# Altium PCB CH32V205V-R0.PcbDoc (part 2 of 3)
Units mm, origin at the board's own origin, x right, y up, seen from the top; angles counter-clockwise.
Board outline 98 x 92 mm, 2 copper layers (Top Layer, Bottom Layer); 69 components, 110 nets, 401 pads, 975 vias.
Unrouted connection lines stored in the file: 82.
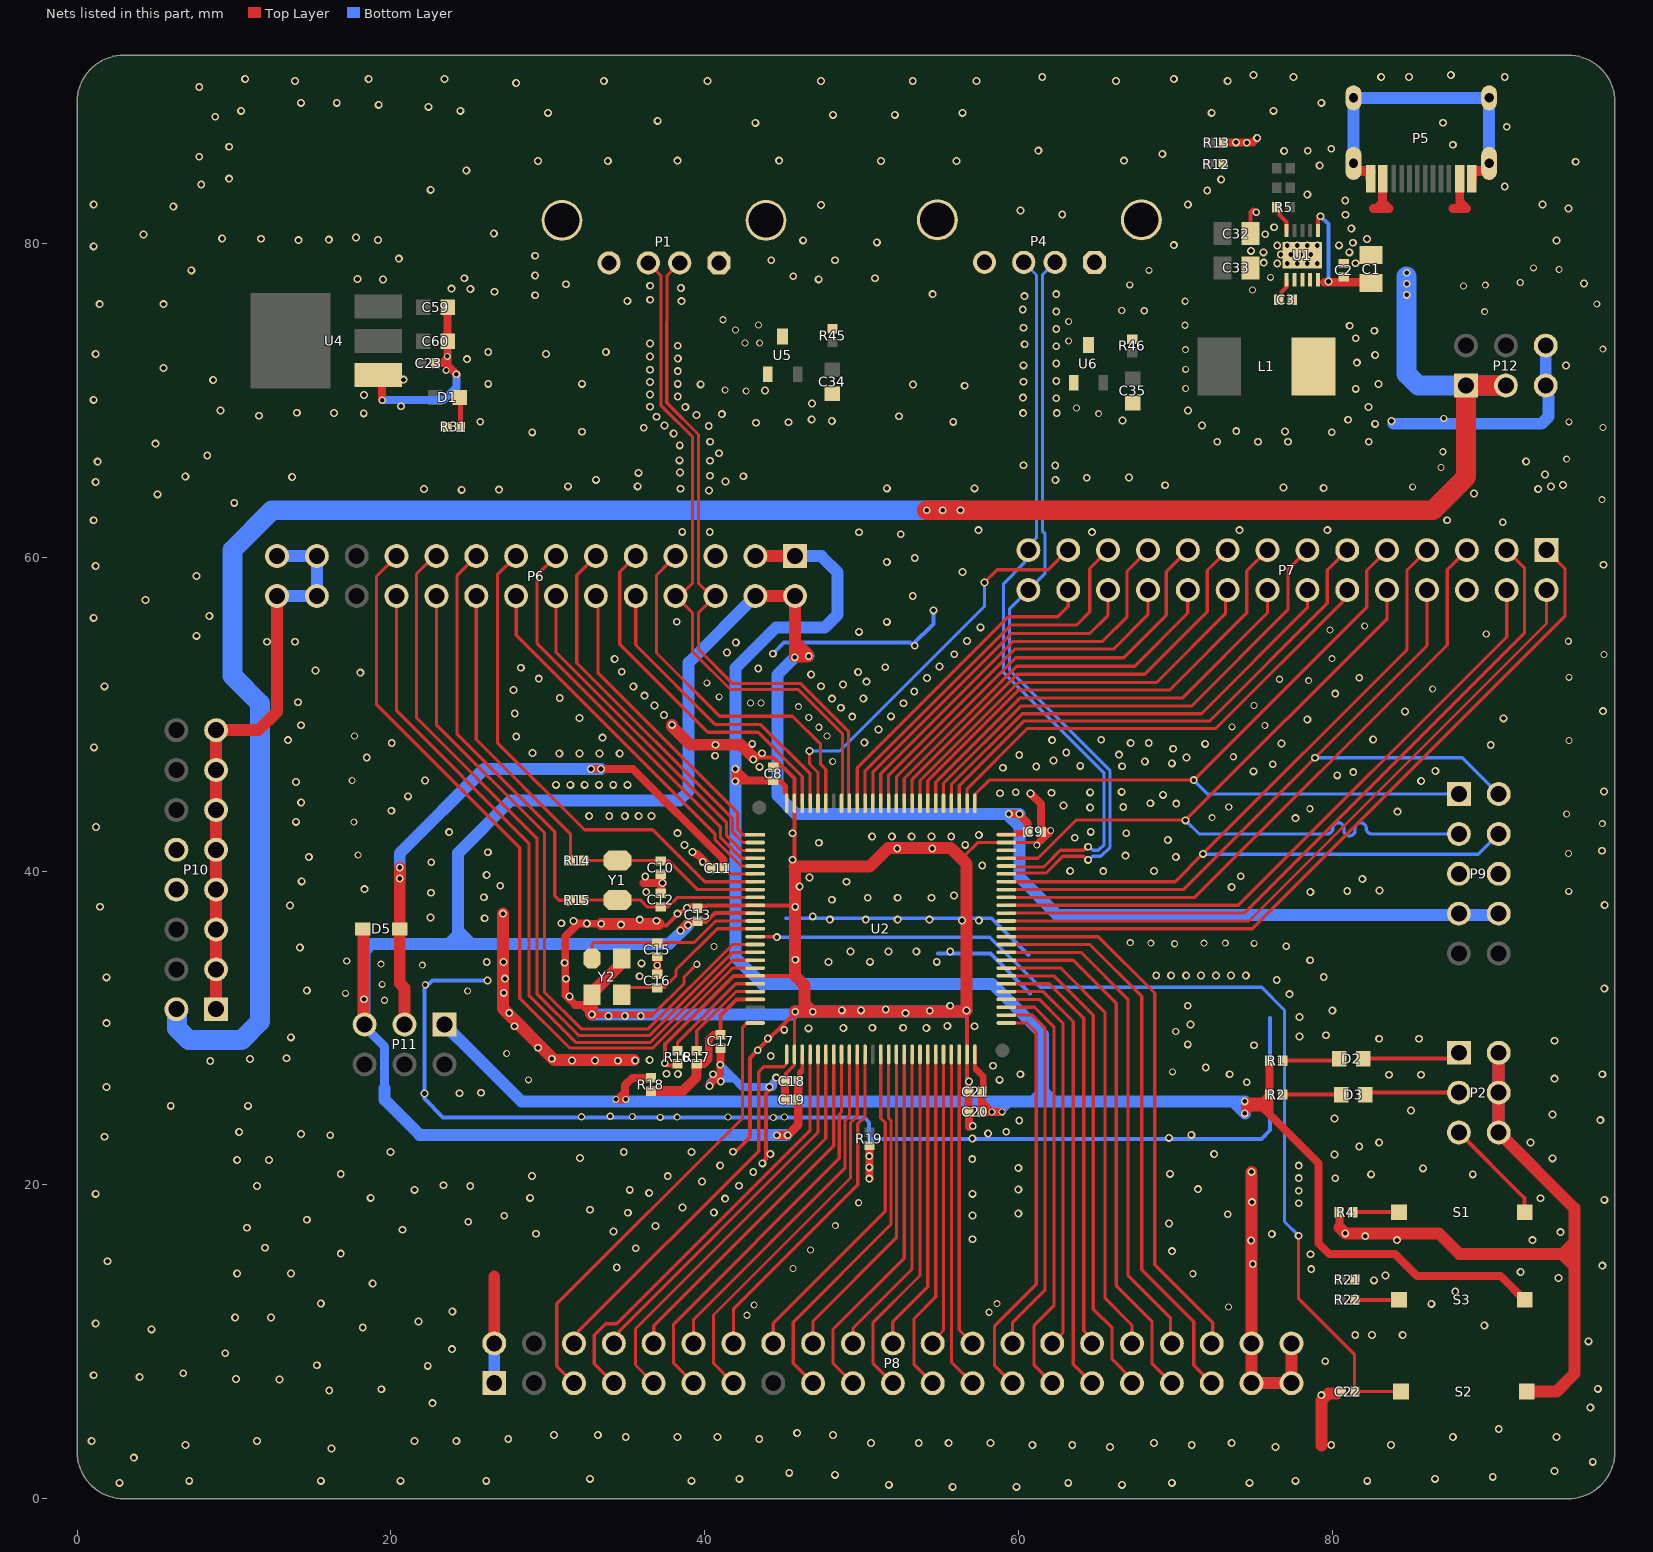
[diagram p2: the nets of this part, all layers, seen from the top]

## Via types
v1: diameter 0.5, hole 0.3, Top Layer to Bottom Layer, tented both sides, 745 vias
v2: diameter 0.45, hole 0.3, Top Layer to Bottom Layer, tented both sides, 120 vias
v3: diameter 0.508, hole 0.305, Top Layer to Bottom Layer, tented both sides, 110 vias

## Nets (pads, with @x,y where several pads share a name; then routed paths per layer and width w, separated by ;. In a path a pad name is that pad's centre, name@x,y a point inside that pad or via, vN(x,y) a via of type N, cw(c..) or ccw(c..) an arc to the next point about the centre after c; other vN are vias at no path point) (continued)
GND: C1.1 C2.1 C8.1 C9.2 C10.1 C11.1 C12.1 C13.2 C15.1 C16.1 C17.2 C18.1 C19.2 C20.2 C21.2 C22.1 C23.2 C32.1 C33.1 C34.2 C35.2 C59.2 C60.2 P1.0 P1.4 P2.2 P2.4 P2.6 P4.0 P4.4 P5.0 P5.A1 P5.B1 P6.5 P6.25 P6.26 P6.27 P6.28 P7.6 P8.1 P8.2 P8.39 P8.40 P8.41 P8.42 P9.5 P9.6 P10.1 P10.3 P10.5 P10.7 P10.8 P10.9 P10.10 P10.11 P10.13 P10.15 P12.5 P12.6 R4.1 R5.1 R12.2 R13.2 R16.1 R19.2 R21.2 R31.1 S2.1 U1.0 U1.5 U2.10 U2.19 U2.27 U2.49 U2.74 U2.99 U4.1 U5.1 U6.1 Y2.2 Y2.4 | length 487.4
  Top Layer w0.2: 36.691,30.843 38.676,32.828 38.676,33.24 v2(39.497,34.062)
  Top Layer w0.203: 45.187,27.111 45.715,27.639 U2.27@45.715,28.321 45.715,30.73 ; 56.506,40.64 56.583,40.718 56.583,40.997 57.402,41.816 59.21,41.816 U2.74@59.214,41.821 v2@61.115,41.821 ; 61.287,41.993 v2@61.115,41.821 ; C9.2@61.433,42.494 61.433,42.469 C9.2@61.581,42.321 ; 61.919,42.246 61.681,42.246 61.657,42.271 61.632,42.271 C9.2@61.608,42.295 ; v2@62.079,42.387 61.608,41.916 ; v2@61.115,41.821 v2@61.297,41.821 ; v2@61.297,41.821 61.297,42.271 61.348,42.321 C9.2@61.416,42.321 ; v2@61.297,41.821 61.513,41.821 61.608,41.916 ; v2@61.297,41.821 61.416,41.94 C9.2@61.416,42.321 ; C9.2@61.416,42.321 C9.2@61.581,42.321 ; C9.2@61.581,42.321 C9.2@61.608,42.295 ; 61.608,41.916 C9.2@61.608,42.295
  Top Layer w0.254: 36.211,36.525 37.557,36.525 v1@38.37,37.338 ; R16.1@38.268,27.711 38.167,27.61 37.63,27.61 37.481,27.759 37.481,28.981 41.821,33.321 U2.19@43.215,33.321 45.715,33.321 45.761,33.274 ; v1@38.308,37.342 38.441,37.342 38.558,37.459 38.633,37.459 38.995,37.821 39.626,37.821 39.669,37.777 40.09,37.777 40.097,37.77 40.136,37.808 43.202,37.808 U2.10@43.215,37.821 45.563,37.821 45.665,37.719 v1(45.761,37.719) ; v1@41.974,22.135 42.889,23.05 42.889,28.102 v1(43.373,28.585) 45.619,30.832 45.904,30.832 ; 43.348,47.244 44.363,47.244 45.715,45.892 U2.99@45.715,44.321 45.727,44.308 45.727,40.293 45.761,40.259 ; v1@43.671,21.382 43.671,21.423 43.897,21.649 43.897,25.837 v1@44.307,26.247 ; C18.1@45.187,26.584 45.187,27.111 ; v1(56.683,31.115) 56.714,31.084 U2.49@56.714,28.321 56.714,26.004 C21.2@56.813,25.905 ; v1@56.884,26.621 56.848,26.586 56.848,25.864 C21.2@56.892,25.82 ; C32.1@74.77,80.621 74.77,81.986 74.947,82.163 ; R5.1@76.324,82.163 R5.1@76.458,82.297 76.631,82.124 76.631,81.818 77.078,81.371 U1.5@77.078,80.824
  Top Layer w0.4: v1@32.568,30.843 36.568,30.843 ; C9.2@61.433,42.494 C9.2@61.495,42.556 ; C9.2@61.495,42.531 v2@62.001,42.531
  Top Layer w0.5: v1(32.807,30.861) 32.193,31.476 31.741,31.476 31.109,32.108 31.109,35.83 31.941,36.663 v1(32.489,36.663) 32.512,36.64 v1(33.405,36.64) ; v1(60.762,44.946) 61.433,44.275 C9.2@61.433,42.494 ; C9.2@61.416,42.419 61.433,42.436 C9.2@61.433,42.469
  Top Layer w0.508: U4.1@19.193,71.604 19.447,71.35 v1(19.447,70.004) ; C23.2@22.825,72.366 23.282,72.366 v2@23.613,72.696 ; C59.2@23.613,75.922 C60.2@23.613,73.763 v2@23.613,72.696 ; v1(24.171,71.655) 23.613,72.213 v2@23.613,72.696 ; 36.09,39.23 36.104,39.243 v1@37.202,39.243 ; C16.1@36.973,33.426 C15.1@36.973,34.558 ; C12.1@37.202,38.583 v1@37.202,39.243 ; C10.1@37.202,39.79 v1@37.202,39.243 ; v1(37.303,39.243) v1@37.202,39.243 ; 39.431,41.079 39.519,41.079 40.399,40.199 C11.1@40.399,40.174 ; v1@40.321,26.412 40.986,27.078 v1(40.986,27.661) ; v1@41.012,27.686 C17.2@41.012,28.716 ; v1@44.651,26.76 44.752,26.76 44.833,26.68 45.058,26.68 45.104,26.634 C19.2@45.104,25.425 ; v1(50.478,21.836) v1@50.494,21.852 ; R19.2@50.494,22.514 v1@50.494,21.852 ; v1@50.514,20.4 50.494,20.421 v1@50.494,21.17 ; v1@50.514,21.15 v1@50.494,21.17 ; C21.2@56.813,25.905 C20.2@56.813,24.653 56.826,24.641 56.826,23.7 ; R13.2@73.053,86.412 73.828,86.412 v1(73.854,86.437) v1@74.514,86.437 ; v1(74.54,86.412) v1@74.514,86.437 ; v1(75.2,86.717) 74.921,86.437 v1@74.514,86.437 ; 80.432,17.297 R4.1@80.432,18.263 ; v1@50.494,21.17 v1@50.494,21.852
  Top Layer w0.635: P5.0@81.339,85.096 81.339,84.78 81.508,84.611 82.417,84.611 P5.B1@82.434,84.594 ; P5.B1@82.384,84.126 P5.B1@82.384,84.594 ; P5.A1@88.884,84.126 88.884,84.594 88.902,84.611 89.811,84.611 89.98,84.78 P5.0@89.98,85.096
  Top Layer w0.762: P10.1@8.866,31.197 P10.3@8.866,33.737 P10.5@8.866,36.277 P10.7@8.866,38.817 P10.9@8.866,41.357 P10.11@8.866,43.897 P10.13@8.866,46.437 P10.15@8.866,48.977 11.554,48.977 12.741,50.165 P6.28@12.741,57.531 ; P8.2@26.584,9.906 26.584,14.174 ; v1(27.143,37.287) 27.143,31.242 30.428,27.957 v1@35.484,27.957 ; P1.0@30.551,81.107 P1.0@30.902,81.459 ; v1(32.807,30.861) 32.807,32.126 Y2.2@32.812,32.131 32.812,32.231 34.543,33.962 34.543,34.262 Y2.4@34.712,34.431 ; v1(33.405,36.64) v1@37.046,36.639 ; v1(37.908,49.316) 37.908,49.218 39.075,48.051 v1(40.679,48.051) 42.304,48.051 v1@43.094,47.26 ; 45.727,40.293 50.509,40.293 51.686,41.47 55.675,41.47 56.506,40.64 56.683,40.462 v1(56.683,31.115) 56.607,31.039 v1(46.879,31.039) ; v1(45.761,31.039) v1(46.879,31.039) ; 45.761,40.259 v1(45.761,37.719) 45.761,33.321 46.346,32.737 46.346,31.572 v1(46.879,31.039) ; P4.0@67.826,81.492 P4.0@68.113,81.205 ; v1(74.837,20.834) 74.844,20.827 P8.40@74.844,9.906 P8.39@74.844,7.366 ; P8.39@74.844,7.239 74.972,7.366 P8.41@77.384,7.366 P8.42@77.384,9.906 ; 79.289,3.404 79.289,6.259 79.736,6.706 C22.1@80.28,6.706 ; 80.432,17.297 v1(80.813,16.916) 86.782,16.916 88.103,15.596 94.656,15.596 ; P2.2@90.592,28.423 P2.4@90.592,25.883 P2.6@90.592,23.343 95.418,18.517 95.418,16.358 ; S2.1@92.369,6.833 94.276,6.833 95.418,7.976 95.418,14.834 ; 94.656,15.596 95.418,14.834 ; 94.656,15.596 95.418,15.596 ; 94.656,15.596 95.418,16.358 ; 95.418,14.834 95.418,15.596 ; 95.418,15.596 95.418,16.358
  Bottom Layer w0.254: v1(26.16,33.033) 26.156,33.037 22.654,33.037 22.128,32.511 22.128,25.506 23.332,24.301 50.173,24.301 50.48,23.995 50.48,22.942 ; v1(44.34,53.848) 45.047,54.556 53.086,54.556 53.217,54.424 v1@53.252,54.424 ; 45.177,36.994 58.279,36.994 60.624,34.649 ; v1@50.48,20.58 50.48,22.942 ; v1(53.381,54.356) 53.282,54.455 v1@53.252,54.424 ; v3@54.665,56.658 54.575,56.569 54.575,55.748 v1@53.252,54.424 ; 54.847,34.737 55.642,34.737 58.194,34.737 60.718,32.212 ; 76.018,30.623 76.018,23.485 75.474,22.942 69.588,22.942 57.054,22.942 50.48,22.942
  Bottom Layer w0.508: v1(19.447,70.004) 23.359,70.004 24.171,70.816 v1(24.171,71.655) ; v1@40.321,26.412 40.321,26.499 40.619,26.797 41.85,26.797 ; v1(40.986,27.661) 41.85,26.797 ; 45.279,26.67 45.189,26.76 44.651,26.76 44.354,26.463 44.354,26.294 44.307,26.247 42.4,26.247 41.85,26.797
  Bottom Layer w0.762: P10.1@8.485,31.578 P10.1@8.866,31.197 ; P6.28@12.741,57.531 P6.26@15.281,57.531 P6.25@15.281,60.071 P6.27@12.741,60.071 ; P8.1@26.584,7.366 P8.2@26.584,9.906 ; P1.0@30.915,81.446 P1.0@30.902,81.459 P1.0@30.919,81.476 ; v1(32.807,30.861) 45.584,30.861 v1(45.761,31.039) v1(46.879,31.039) 56.607,31.039 v1(56.683,31.115) ; P1.4@33.766,78.895 P1.4@33.903,78.759 ; P4.0@67.81,81.476 P4.0@67.826,81.492 ; P5.0@81.304,89.241 P5.0@81.339,89.276 ; P5.0@81.339,85.096 P5.0@81.339,89.276 ; v1@83.881,68.505 93.321,68.505 93.767,68.951 93.767,70.227 93.735,70.259 93.735,70.798 P12.5@93.59,70.943 P12.6@93.59,73.483 ; P5.0@89.98,85.096 P5.0@89.98,89.276 P5.0@81.339,89.276 ; P2.6@90.592,23.343 P2.4@90.592,25.883 P2.2@90.592,28.423
  other v1: 55.794,0.762 59.858,0.762 51.73,0.889 66.589,0.889 2.708,1.016 63.16,1.016 69.764,1.016 74.717,1.016 7.153,1.143 15.535,1.143 20.615,1.143 26.076,1.143 39.157,1.143 77.638,1.143 82.21,1.143 32.68,1.27 42.205,1.27 86.528,1.27 90.211,1.397 48.301,1.524 45.38,1.651 94.148,1.778 96.584,2.356 3.621,2.623 16.219,3.205 65.827,3.302 76.368,3.302 6.911,3.426 60.874,3.429 63.414,3.429 71.034,3.429 79.924,3.429 83.734,3.429 50.587,3.556 53.635,3.556 55.54,3.556 58.207,3.556 68.621,3.556 73.574,3.556 0.93,3.683 11.471,3.683 21.504,3.683 24.171,3.683 27.473,3.81 43.475,3.81 34.966,3.937 38.268,3.937 40.808,3.937 87.671,3.937 94.275,3.937 30.394,4.064 33.188,4.064 48.174,4.064 45.888,4.191 90.592,4.445 96.434,5.817 22.647,6.096 79.289,6.604 16.072,6.907 19.391,6.981 96.91,7.006 12.907,7.6 10.13,7.636 3.991,7.763 1.057,7.874 6.772,8.001 22.352,8.47 15.281,8.509 79.543,8.763 9.439,9.271 23.891,9.539 96.307,10.033 81.448,10.439 82.515,10.439 84.471,10.439 4.74,10.795 18.202,10.922 89.678,11.049 1.184,11.176 21.758,11.303 10.074,11.557 12.36,11.557 23.917,11.938 86.3,12.421 15.535,12.446 87.824,13.208 18.837,13.716 82.642,13.919 94.402,14.072 83.379,14.224 10.201,14.351 13.63,14.351 91.989,14.453 78.643,14.633 34.396,14.734 97.196,14.859 74.916,14.968 1.936,15.137 78.6,15.584 16.805,15.621 69.768,15.781 35.605,15.963 11.979,16.002 74.816,16.463 84.115,16.485 92.751,16.485 57.064,16.535 82.083,16.739 76.137,16.877 29.251,16.891 94.529,16.993 20.742,17.145 10.836,17.272 36.855,17.38 69.588,17.549 24.933,17.653 14.646,17.78 27.219,18.034 57.064,18.058 73.324,18.133 59.982,18.186 35.098,18.23 40.581,18.249 32.68,18.415 38.576,18.568 77.846,18.832 74.871,18.906 97.323,19.05 41.297,19.125 93.259,19.152 18.71,19.177 28.87,19.177 1.184,19.431 57.064,19.431 77.846,19.632 21.504,19.685 35.22,19.685 59.982,19.709 71.427,19.734 11.471,19.939 25.06,19.939 42.185,19.947 23.35,19.977 39.83,20.222 50.478,20.4 77.846,20.431 80.178,20.422 28.997,20.574 37.645,20.562 82.464,20.676 88.941,20.676 16.805,20.701 69.643,20.708 43.087,20.822 85.766,21.057 59.982,21.082 50.478,21.118 40.981,21.245 77.846,21.231 43.671,21.377 10.201,21.59 12.233,21.59 57.045,21.642 94.021,21.692 32.045,21.717 80.128,21.946 72.457,21.971 19.98,22.098 34.839,22.098 39.157,22.098 41.804,22.116 81.702,22.454 82.972,22.708 92.624,22.708 57.054,22.957 69.588,22.999 1.754,23.069 16.138,23.162 71.009,23.19 14.265,23.241 58.055,23.283 10.328,23.368 59.21,23.392 57.073,23.761 60.037,24.109 97.069,24.13 80.128,24.232 94.021,24.486 85.004,24.74 5.971,25.039 10.898,25.039 22.144,25.828 24.365,25.84 25.743,25.878 1.881,26.244 44.129,26.247 40.296,26.311 74.54,26.543 41.017,26.596 56.833,26.596 58.786,26.696 94.148,26.772 44.55,26.837 83.607,27.026 85.639,27.026 38.287,27.063 40.524,27.049 60.112,27.051 73.447,27.051 97.196,27.051 37.566,27.088 71.923,27.483 58.365,27.597 37.451,27.751 8.485,27.895 31.543,27.923 34.463,27.912 35.561,27.923 33.003,27.934 36.489,27.966 11.025,28.022 30.258,28.044 13.346,28.07 44.208,28.212 29.38,28.747 74.997,28.905 70.78,28.956 94.148,29.185 82.972,29.312 85.512,29.312 44.019,29.335 13.626,29.402 77.897,29.462 79.586,29.54 45.062,29.88 46.617,29.977 48.832,29.996 54.119,29.996 50.679,30.016 52.642,30.016 27.872,30.109 55.46,30.132 57.19,30.113 70.958,30.226 1.881,30.308 77.897,30.703 33.868,30.766 34.909,30.766 35.925,30.766 52.798,30.949 27.543,30.959 48.735,31.124 49.96,31.124 54.333,31.104 79.991,31.118 51.534,31.182 55.635,31.415 70.78,31.42 31.38,32.012 77.267,32.159 27.191,32.24 14.646,32.385 97.323,32.512 76.45,33.056 27.271,33.147 31.163,33.141 1.881,33.229 79.443,33.252 35.849,33.303 68.768,33.346 69.72,33.346 70.673,33.346 71.625,33.346 72.577,33.346 73.529,33.346 74.482,33.346 35.963,34.121 31.072,34.156 26.103,34.201 27.18,34.201 47.89,34.201 50.533,34.216 54.783,34.216 78.578,34.318 45.772,34.347 49.292,34.874 51.705,34.874 53.483,34.874 55.642,34.874 14.2,35.134 77.05,35.212 34.667,36.587 30.863,36.674 31.63,36.823 36.922,36.83 56.387,36.852 57.467,36.852 35.855,36.906 47.971,36.906 50.257,36.906 52.289,36.906 54.321,36.906 25.975,36.99 22.529,37.04 46.886,37.116 38.268,37.287 38.868,37.655 1.464,37.723 13.565,37.801 97.342,37.844 48.098,38.176 50.384,38.303 52.289,38.303 54.448,38.303 25.924,38.329 55.883,38.447 22.554,38.615 36.268,38.673 78.59,38.672 80.94,38.735 82.998,38.76 18.318,38.849 73.574,38.989 46.046,39.011 26.965,39.065 49.033,39.323 14.313,39.346 81.906,39.497 46.67,39.587 36.211,39.649 74.159,39.675 26.102,39.751 68.621,40.005 57.683,40.355 22.573,40.561 39.869,40.589 45.59,40.726 14.773,40.894 70.018,40.894 66.806,40.985 26.178,41.199 39.213,41.21 97.176,41.293 52.264,41.445 54.495,41.445 38.709,41.662 56.602,41.67 47.27,41.806 69.51,41.986 63.579,42.127 50.665,42.203 51.924,42.203 53.184,42.203 54.443,42.203 55.703,42.203 57.467,42.298 38.259,42.417 45.59,42.406 66.856,42.409 23.713,42.482 64.593,42.498 1.21,42.803 13.946,43.135 77.637,43.375 32.632,43.509 33.916,43.509 34.91,43.509 35.787,43.509 36.603,43.509 84.141,43.79 20.031,43.84 66.671,44.081 70.044,44.298 68.393,44.323 14.278,44.373 21.09,44.762 69.206,44.856 58.817,44.958 62.089,44.996 59.82,45.021 64.559,45.016 66.566,45.047 97.303,45.073 30.526,45.493 31.436,45.493 32.347,45.493 33.257,45.493 34.167,45.493 35.078,45.493 13.946,45.675 85.651,45.733 22.168,45.773 80.305,46.101 81.321,46.304 74.971,46.355 86.554,46.38 58.997,46.583 43.491,46.643 61.124,46.661 66.598,46.683 63.929,46.704 76.191,46.812 69.764,46.863 43.088,47.113 18.456,47.244 40.659,47.349 60.035,47.401 66.401,47.419 30.733,47.488 34.575,47.488 43.648,47.51 29.02,47.521 63.038,47.552 69.846,47.792 1.083,47.883 90.084,48.031 43.027,48.107 71.885,48.107 76.749,48.133 20.057,48.158 67.137,48.156 50.171,48.19 13.438,48.342 62.136,48.345 65.27,48.366 82.591,48.387 27.991,48.57 51.068,49.019 14.268,49.29 78.4,49.657 90.897,49.733 32.016,49.753 49.4,49.84 51.868,49.858 37.397,49.948 27.889,50.046 84.623,50.165 97.233,50.19 48.675,50.405 36.797,50.556 52.668,50.697 14.076,50.759 48.11,50.987 50.105,51.003 30.762,51.031 36.164,51.181 80.178,51.308 53.353,51.44 27.806,51.541 1.754,51.771 35.449,51.765 47.412,51.782 48.809,51.892 50.308,52.07 29.416,52.263 54.163,52.298 81.702,52.324 46.78,52.522 18.053,52.646 49.775,52.68 34.712,52.705 15.201,52.78 43.404,52.912 28.283,52.961 51.497,52.992 54.964,53.031 34.255,53.518 55.893,53.822 41.42,53.93 41.98,54.563 12.106,54.61 13.884,54.61 56.704,54.666 57.568,55.53 38.212,55.892 51.603,55.88 1.057,56.134 53.254,57.531 1.184,59.436 97.273,59.523 51.603,59.69 53.381,59.944 52.492,61.468 40.32,61.606 49.825,61.595 38.563,61.616 90.846,62.23 1.057,62.357 40.268,64.247 38.459,64.361 1.184,64.787 62.342,64.921 40.33,65.193 38.427,65.401 62.337,65.845 60.304,65.86 1.311,66.092 40.33,66.15 38.396,66.171 38.407,67.127 40.341,67.356 72.658,67.357 75.252,67.357 77.167,67.357 82.307,67.357 38.017,67.883 29.006,67.958 79.955,67.963 32.172,67.997 76.973,68.011 73.87,68.035 36.109,68.251 40.254,68.355 71.688,68.399 82.719,68.496 43.27,68.569 45.335,68.598 25.695,68.632 55.832,68.627 48.097,68.685 83.76,68.683 66.617,68.714 46.809,68.77 80.997,68.763 36.926,68.946 52.377,68.98 11.598,69.013 18.274,69.169 16.368,69.194 60.289,69.182 62.434,69.182 14.007,69.206 70.787,69.347 38.762,69.574 82.293,69.569 36.509,69.584 20.641,69.623 46.835,69.8 1.057,70.029 62.394,70.131 60.285,70.17 38.279,70.237 18.285,70.335 43.841,70.621 81.482,70.726 56.559,70.925 53.274,71.012 26.203,71.045 32.172,71.045 38.279,71.047 82.937,71.041 36.509,71.161 60.305,71.179 62.394,71.235 20.797,71.318 38.279,71.857 36.509,71.95 94.879,72.218 60.305,72.227 62.394,72.339 81.555,72.399 82.719,72.884 1.184,72.95 29.886,72.95 26.203,73.077 33.696,73.077 62.394,73.443 38.279,73.478 60.384,73.572 36.509,73.613 81.482,73.951 82.67,74.435 62.394,74.548 60.305,74.62 81.094,74.751 62.394,75.652 60.266,75.787 1.438,76.125 35.067,76.321 38.513,76.319 36.52,76.402 29.191,76.696 26.601,76.919 23.864,77.113 38.478,77.156 36.52,77.294 31.156,77.395 24.679,77.776 50.841,77.776 45.634,77.903 29.191,77.955 76.477,78.717 77.116,78.717 77.754,78.717 78.393,78.717 79.031,78.717 81.468,78.732 75.625,78.77 44.237,78.919 48.301,78.919 29.191,79.214 76.704,79.293 77.343,79.293 77.982,79.293 78.62,79.293 75.604,79.425 74.812,79.52 1.057,79.808 76.48,79.869 77.119,79.869 77.757,79.869 78.396,79.869 79.035,79.869 81.298,80.035 50.968,80.062 46.269,80.189 4.232,80.57 75.718,80.582 81.201,80.948 76.284,81.026 80.826,81.823 75.139,81.979 95.037,82.221 6.137,82.348 47.412,82.45 1.057,82.475 93.386,82.475 80.813,82.729 78.4,83.11 72.02,83.368 22.532,83.409 90.973,83.618 7.915,83.745 72.906,84.071 9.693,84.126 79.183,84.958 95.494,85.203 7.788,85.523 76.917,85.887 78.423,85.901 79.924,86.031 9.693,86.158 87.671,86.285 91.1,87.428 87.036,87.682 8.804,88.063 10.455,88.444 24.425,88.444 22.393,88.698 19.218,88.825 14.265,88.952 16.551,88.952 79.289,88.952 7.788,89.968 27.981,90.222 13.884,90.349 33.569,90.349 40.173,90.349 47.412,90.349 53.254,90.349 57.318,90.349 66.208,90.349 73.32,90.349 10.709,90.476 18.583,90.476 23.409,90.476 69.891,90.476 61.509,90.603 77.511,90.603 83.099,90.603 84.877,90.603 90.973,90.603 74.971,90.73 87.544,90.73
  other v2: 42.692,11.696 58.124,11.888 73.373,12.22 43.149,12.351 58.626,12.437 71.105,14.34 45.618,14.676 46.737,15.861 48.317,17.408 49.809,18.867 37.162,24.307 38.243,24.316 44.37,24.303 32.139,24.345 41.483,24.327 45.081,24.333 35.386,24.366 33.976,24.376 28.767,26.695 69.811,27.209 27.374,28.371 70.013,29.783 19.593,31.768 17.105,32.206 24.891,32.364 22.191,32.755 19.444,32.783 36.973,33.992 22.005,34.003 19.37,34.068 17.185,34.266 40.585,35.195 69.941,35.371 68.426,35.404 71.813,35.404 73.173,35.404 75.007,35.399 67.111,35.438 95.057,38.709 17.914,41.029 95.035,41.119 61.159,41.651 62.039,42.587 97.197,43.02 17.635,43.134 72.336,43.401 94.923,43.635 78.559,43.973 73.388,44.09 17.528,45.776 48.151,46.979 73.683,47.286 95.075,48.319 17.678,48.611 47.794,48.607 47.267,49.167 73.593,49.194 75.69,49.28 46.627,49.79 45.98,50.477 75.005,50.545 42.919,50.709 43.59,50.709 40.921,51.103 86.383,51.607 40.133,51.997 78.482,52.134 76.619,52.222 95.075,52.343 79.972,53.539 97.297,53.801 95.03,54.645 89.796,55.103 79.838,55.366 82.053,55.62 97.178,63.666 85.107,64.482 86.916,65.717 94.921,66.251 87.031,66.722 97.238,68.264 95.066,68.629 87.088,68.847 65.101,69.145 63.683,69.507 42.64,70.587 41.303,70.657 70.647,70.751 23.52,71.908 70.647,71.971 23.598,72.8 70.629,73.223 97.225,73.26 42.562,73.653 43.502,73.653 63.191,73.775 41.962,74.485 70.606,74.783 43.425,74.793 63.191,75.02 41.161,75.132 89.699,75.644 66.573,75.723 68.006,75.705 96.844,76.134 70.613,76.312 74.899,77.03 88.343,77.276 67.081,77.356 89.741,77.34 91.967,77.509 76.047,77.837 68.314,78.281 94.446,78.336 92.814,78.442
  other v3: 34.18,17.025 36.459,19.491 44.176,21.963 63.287,40.005 65.393,39.995 64.557,44.044 62.856,44.171 68.04,46.98 62.223,47.046 70.692,47.229 32.018,47.484 33.298,47.484 68.291,48.158 33.475,48.499 7.618,54.991 49.825,55.245 8.429,56.261 54.575,56.617 4.359,57.277 7.618,58.801 56.429,59.055 64.684,61.595 57.445,61.722 74.082,61.722 79.67,61.722 87.31,62.356 10.018,63.466 5.121,64.008 89.015,64.061 24.509,64.293 26.887,64.303 22.101,64.339 93.107,64.348 51.603,64.389 57.191,64.389 79.441,64.411 76.884,64.435 31.283,64.516 35.728,64.516 93.92,64.508 69.341,64.586 94.682,64.593 41.312,64.827 33.061,64.932 64.341,65.065 13.707,65.106 67.03,65.089 6.899,65.151 42.455,65.159 93.539,65.279 35.779,65.381 92.345,66.092 8.296,66.473 40.91,66.625 4.994,67.235 37.435,68.392 39.481,69.056 41.084,69.115 9.135,69.343 36.505,70.377 39.739,71.015 8.677,71.299 5.502,72.061 24.857,72.62 38.283,72.672 36.505,72.786 5.502,76.125 60.366,76.633 54.524,76.76 62.398,76.76 25.06,77.09 96.036,77.443 19.498,77.7 47.261,77.707 17.872,77.725 7.28,78.284 20.502,79.021 81.073,79.427 69.891,79.884 80.414,79.874 94.275,80.189 14.11,80.204 19.183,80.217 16.041,80.231 82.204,80.276 11.721,80.293 9.252,80.316 17.769,80.367 26.559,80.621 62.779,81.84 60.112,82.094 70.78,82.475 24.806,84.634 29.378,85.244 33.823,85.244 51.222,85.244 56.048,85.244 38.268,85.269 44.745,85.269 66.716,85.269 69.155,85.701 61.255,85.904 43.221,87.682 36.998,87.809 48.174,88.19 52.111,88.19 30.013,88.317 56.429,88.317 72.304,88.317 76.241,88.444
KEY: P2.5 S1.1 | length 6.8
  Top Layer w0.254: P2.5@88.052,23.343 92.242,19.153 S1.1@92.242,18.263
LED1: D2.2 P2.1 | length 6.2
  Top Layer w0.254: D2.2@81.973,28.042 87.671,28.042 P2.1@88.052,28.423
LED2: D3.2 P2.3 | length 6
  Top Layer w0.254: D3.2@82.1,25.756 82.227,25.883 P2.3@88.052,25.883
NC: U2.73
NetC3_1: C3.1 U1.6 | length 1.5
  Top Layer w0.254: C3.1@76.585,76.404 76.758,76.577 76.758,76.886 77.078,77.206 U1.6@77.078,77.674
NetC3_2: C3.2 L1.1 U1.7 U1.8
NetD1_2: D1.2 R31.2 | length 1.9
  Top Layer w0.305: D1.2@24.375,70.181 24.437,70.119 R31.2@24.437,68.302
NetD2_1: D2.1 R1.2 | length 3.6
  Top Layer w0.254: R1.2@76.837,27.915 80.305,27.915 D2.1@80.432,28.042
NetD3_1: D3.1 R2.2 | length 3.7
  Top Layer w0.254: R2.2@76.821,25.756 D3.1@80.559,25.756
NetR4_2: R4.2 S1.2 | length 3
  Top Layer w0.254: R4.2@81.282,18.263 S1.2@84.242,18.263
NetR22_2: R22.2 S3.2 | length 2.8
  Top Layer w0.254: R22.2@81.409,12.675 S3.2@84.242,12.675
NRST: C22.2 S2.2 U2.14 | length 64.8
  Top Layer w0.203: U2.14@43.215,35.821 43.219,35.816 44.566,35.816 v1(44.593,35.789) ; v1(77.842,16.764) 77.842,12.751 81.409,9.183 C22.2@81.409,6.833 S2.2@84.369,6.833
  Bottom Layer w0.203: v1(44.593,35.789) 58.17,35.789 61.366,32.593 75.494,32.593 76.944,31.144 76.944,17.662 v1(77.842,16.764)
PA2: P8.5 U2.25 | length 28.9
  Top Layer w0.203: P8.5@31.664,7.366 30.572,8.458 30.572,12.43 42.409,24.267 42.409,30.036 42.686,30.313 43.206,30.313 U2.25@43.215,30.321
PA3: P8.6 U2.26 | length 24.8
  Top Layer w0.203: P8.6@31.664,9.906 31.917,10.159 31.917,10.632 43.437,22.152 43.437,27.205 43.76,27.528 45.026,27.528 45.21,27.711 45.21,28.316 U2.26@45.215,28.321
PA4: P8.7 U2.29 | length 27.6
  Top Layer w0.203: P8.7@34.204,7.366 32.957,8.614 32.957,10.426 33.689,11.158 34.393,11.158 46.715,23.48 U2.29@46.715,28.321
PA5: P8.8 U2.30 | length 23.8
  Top Layer w0.203: P8.8@34.204,9.906 34.337,10.039 34.337,10.396 34.54,10.599 34.54,10.673 47.215,23.348 U2.30@47.215,28.321
PA6: P8.9 U2.31 | length 26.5
  Top Layer w0.203: P8.9@36.744,7.366 35.584,8.527 35.584,10.828 47.715,22.959 U2.31@47.715,28.321
PA7: P8.10 U2.32 | length 23.2
  Top Layer w0.203: P8.10@36.744,9.906 36.744,11.027 48.215,22.498 U2.32@48.215,28.321
PA8: P7.5 U2.67 | length 41.3
  Top Layer w0.203: U2.67@59.214,38.321 71.23,38.321 87.316,54.407 87.316,59.207 P7.5@88.56,60.452
PA9: P7.8 P9.2 U2.68 | length 49.5
  Top Layer w0.203: U2.68@59.214,38.821 70.485,38.821 86.02,54.356 86.02,57.785 P7.8@85.893,57.912
  Bottom Layer w0.203: v1(78.883,47.219) 88.281,47.219 P9.2@90.592,44.907
PA10: P7.7 P9.4 U2.69 | length 57.9
  Top Layer w0.203: U2.69@59.214,39.321 69.969,39.321 v1(71.746,41.097) 84.75,54.102 84.75,59.182 P7.7@86.02,60.452
  Bottom Layer w0.203: v1(71.746,41.097) 71.771,41.072 89.297,41.072 P9.4@90.592,42.367
PA11: P4.2 P7.28 U2.70 | length 48.7
  Top Layer w0.203: U2.70@59.214,39.821 59.742,39.821 59.802,39.88 61.756,39.88 62.82,40.945 64.143,40.945 v1@64.321,40.767
  Bottom Layer w0.203: P4.2@62.271,78.792 P4.2@62.326,78.792 61.517,77.983 61.517,61.664 61.687,61.493 61.687,58.979 P7.28@60.62,57.912 59.427,56.718 59.427,52.787 65.827,46.386 65.827,41.529 65.243,40.945 64.718,40.945 64.54,40.767 v1@64.43,40.767
  other v1: 64.43,40.716
PA12: P4.3 P7.27 U2.71 | length 48.4
  Top Layer w0.203: U2.71@59.214,40.321 59.742,40.321 59.802,40.261 61.598,40.261 62.662,41.326 64.143,41.326 64.321,41.504 64.43,41.504 v1@64.54,41.504
  Top Layer w0.3: v1@64.371,41.444 v1@64.43,41.504
  Bottom Layer w0.203: P4.3@60.45,78.792 P4.3@60.326,78.792 61.136,77.983 61.136,61.231 60.911,61.007 60.911,60.452 P7.27@60.62,60.452 60.368,60.199 60.368,59.64 59.046,58.318 59.046,52.629 65.446,46.228 65.446,41.687 65.085,41.326 64.718,41.326 64.54,41.504 v1@64.43,41.504
  other v1: 64.43,41.554
PA13: P7.10 P9.3 U2.72 | length 52.1
  Top Layer w0.203: U2.72@59.214,40.821 61.233,40.821 63.668,43.256 70.603,43.256 v1(70.628,43.231) 83.48,56.083 P7.10@83.48,57.912
  Bottom Layer w0.203: v1(70.628,43.231) 71.492,42.367 79.562,42.367 79.663,42.367 ccw(c79.663,42.723) 80.019,42.723 cw(c80.375,42.723) 80.73,42.723 80.73,42.594 ccw(c81.086,42.594) 81.441,42.594 81.441,42.723 cw(c81.797,42.723) 82.153,42.723 ccw(c82.508,42.723) 82.508,42.367 86.68,42.367 P9.3@88.052,42.367
PA14: P7.9 P9.1 U2.76 | length 51.9
  Top Layer w0.203: U2.76@57.214,44.321 57.219,44.326 57.219,44.884 58.131,45.796 v1(71.161,45.796) 82.185,56.82 82.185,59.157 P7.9@83.48,60.452
  Bottom Layer w0.203: v1(71.161,45.796) 72.05,44.907 P9.1@88.052,44.907
PA15: P7.12 U2.77 | length 30.7
  Top Layer w0.203: U2.77@56.714,44.321 56.714,45.256 60.543,49.085 72.57,49.085 80.688,57.202 80.688,57.659 P7.12@80.94,57.912
PB0: P8.13 U2.35 | length 25.3
  Top Layer w0.203: P8.13@41.824,7.366 40.554,8.636 40.554,11.711 49.284,20.44 49.284,23.95 49.715,24.381 U2.35@49.715,28.321
PB1: P8.14 U2.36 | length 21.9
  Top Layer w0.203: P8.14@41.824,9.906 41.824,12.088 49.749,20.013 49.749,23.889 50.214,24.354 U2.36@50.214,28.321
PB3: P7.24 U2.89 | length 22.7
  Top Layer w0.203: U2.89@50.714,44.321 50.714,46.304 59.543,55.132 64.518,55.132 65.7,56.314 P7.24@65.7,57.912
PB4: P7.23 U2.90 | length 25
  Top Layer w0.203: U2.90@50.214,44.321 50.214,46.388 59.503,55.677 63.686,55.677 64.532,56.523 64.532,59.284 P7.23@65.7,60.452
PB5: P7.26 U2.91 | length 21
  Top Layer w0.203: U2.91@49.715,44.321 49.715,46.576 59.349,56.21 62.5,56.21 63.16,56.871 P7.26@63.16,57.912
PB6: P1.3 P6.8 U2.93 | length 43.2
  Top Layer w0.203: P1.3@36.403,78.759 37.213,77.948 37.213,75.151 37.202,75.14 37.202,69.684 39.221,67.664 39.221,58.344 38.408,57.531 P6.8@38.141,57.531 39.221,56.452 39.221,53.984 41.637,51.568 45.953,51.568 48.774,48.747 48.774,44.908 48.715,44.849 U2.93@48.715,44.321
PB7: P1.2 P6.6 U2.92 | length 43.2
  Top Layer w0.203: P1.2@38.403,78.759 38.403,78.754 37.594,77.946 37.594,74.994 37.583,74.982 37.583,69.841 39.602,67.822 39.602,58.344 40.415,57.531 P6.6@40.681,57.531 39.602,56.452 39.602,54.142 41.795,51.949 46.111,51.949 49.155,48.905 49.155,44.908 49.215,44.849 U2.92@49.215,44.321
PB8: P6.7 U2.95 | length 23.1
  Top Layer w0.203: P6.7@37.71,59.918 37.71,59.64 36.922,58.852 36.922,53.899 40.96,49.861 45.591,49.861 47.379,48.072 47.379,46.807 47.715,46.472 U2.95@47.715,44.321
PB9: P7.25 U2.96 | length 26.2
  Top Layer w0.203: v1(46.673,47.657) 46.673,46.824 47.215,46.283 U2.96@47.215,44.321 ; v1(57.826,58.395) 58.639,59.207 61.891,59.207 P7.25@63.11,60.427
  Bottom Layer w0.203: v1(46.673,47.657) 48.619,47.657 57.826,56.864 v1(57.826,58.395)
PB10: P8.25 U2.47 | length 21.5
  Top Layer w0.203: U2.47@55.714,28.321 55.714,8.716 P8.25@57.064,7.366
PB11: P8.26 U2.48 | length 18.8
  Top Layer w0.203: U2.48@56.214,28.321 56.214,10.756 P8.26@57.064,9.906
PB12: P8.27 U2.51 | length 26.1
  Top Layer w0.203: U2.51@59.214,30.321 59.219,30.316 60.535,30.316 61.128,29.723 61.128,13.66 58.455,10.986 58.455,8.516 P8.27@59.604,7.366
PB13: P8.28 U2.52 | length 23.8
  Top Layer w0.203: U2.52@59.214,30.821 60.864,30.821 61.687,29.997 61.687,13.309 59.604,11.226 P8.28@59.604,9.906
PB14: P8.29 U2.53 | length 27.3
  Top Layer w0.203: U2.53@59.214,31.321 61.01,31.321 62.246,30.085 62.246,12.294 60.972,11.02 60.972,8.538 P8.29@62.144,7.366
PB15: P8.30 U2.54 | length 24.9
  Top Layer w0.203: U2.54@59.214,31.821 61.312,31.821 62.83,30.302 62.83,10.592 P8.30@62.144,9.906
PC0: P6.20 U2.15 | length 44.7
  Top Layer w0.203: P6.20@22.901,57.531 22.901,49.327 29.785,42.443 29.785,32.283 32.127,29.942 36.394,29.942 41.773,35.321 U2.15@43.215,35.321
PC1: P6.19 U2.16 | length 48.9
  Top Layer w0.203: P6.19@22.901,60.071 22.767,60.071 21.631,58.936 21.631,49.759 29.302,42.088 29.302,32.182 31.957,29.527 36.482,29.527 41.776,34.821 U2.16@43.215,34.821
PC2: P6.22 U2.17 | length 46.8
  Top Layer w0.203: P6.22@20.361,57.531 20.361,50.216 28.794,41.783 28.794,32.08 31.791,29.083 36.541,29.083 41.779,34.321 U2.17@43.215,34.321
PC3: P6.21 U2.18 | length 50.9
  Top Layer w0.203: P6.21@20.361,60.071 19.091,58.801 19.091,50.597 28.21,41.478 28.21,31.902 31.385,28.727 36.688,28.727 41.782,33.821 U2.18@43.215,33.821
PC4: P8.11 U2.33 | length 25.9
  Top Layer w0.203: P8.11@39.284,7.366 38.014,8.636 38.014,11.133 48.573,21.691 48.573,24.5 48.715,24.642 U2.33@48.715,28.321
PC5: P8.12 U2.34 | length 22.5
  Top Layer w0.203: P8.12@39.284,9.906 39.284,11.414 48.928,21.058 48.928,24.098 49.215,24.384 U2.34@49.215,28.321
PC6: P7.1 U2.63 | length 48.5
  Top Layer w0.203: U2.63@59.214,36.321 74.894,36.321 94.809,56.236 94.809,59.284 P7.1@93.64,60.452
PC7: P7.2 U2.64 | length 44.4
  Top Layer w0.203: U2.64@59.214,36.821 74.683,36.821 93.64,55.778 P7.2@93.64,57.912
PC8: P7.3 U2.65 | length 46.2
  Top Layer w0.203: U2.65@59.214,37.321 74.37,37.321 92.243,55.194 92.243,59.309 P7.3@91.1,60.452
PC9: P7.4 U2.66 | length 42.2
  Top Layer w0.203: U2.66@59.214,37.821 74.007,37.821 91.1,54.915 P7.4@91.1,58.156
PC10: P7.11 U2.78 | length 33.3
  Top Layer w0.203: U2.78@56.214,44.321 56.214,45.445 60.327,49.557 72.164,49.557 79.67,57.064 79.67,59.182 P7.11@80.94,60.452
PC11: P7.14 U2.79 | length 29.7
  Top Layer w0.203: U2.79@55.714,44.321 55.714,45.514 60.225,50.025 71.656,50.025 78.4,56.769 P7.14@78.4,57.912
PC12: P7.13 U2.80 | length 32.1
  Top Layer w0.203: U2.80@55.214,44.321 55.214,45.585 60.141,50.511 71.016,50.511 77.156,56.651 77.156,59.207 P7.13@78.4,60.452
PC13: P6.15 U2.7 | length 32.5
  Top Layer w0.203: P6.15@27.981,60.071 26.788,58.877 26.788,48.185 32.337,42.636 36.679,42.636 39.994,39.321 U2.7@43.215,39.321
PC14: P6.18 R14.1 | length 19.4
  Top Layer w0.203: P6.18@25.441,57.531 25.441,48.387 31.44,42.388 R14.1@31.44,40.665
PC15: P6.17 R15.1 | length 25.8
  Top Layer w0.203: P6.17@25.441,60.071 24.215,58.845 24.215,48.724 30.445,42.494 30.445,38.43 30.73,38.145 R15.1@31.44,38.145
PD0: P7.16 U2.81 | length 28.4
  Top Layer w0.203: U2.81@54.714,44.321 54.714,45.67 60.071,51.026 70.435,51.026 75.86,56.451 P7.16@75.86,57.912
PD1: P7.15 U2.82 | length 30.7
  Top Layer w0.203: U2.82@54.214,44.321 54.214,45.765 59.98,51.531 69.614,51.531 74.54,56.456 74.54,59.131 P7.15@75.86,60.452
PD2: P7.18 U2.83 | length 26.9
  Top Layer w0.203: U2.83@53.714,44.321 53.714,45.768 59.964,52.017 68.791,52.017 73.178,56.405 73.178,57.77 P7.18@73.32,57.912
PD3: P7.17 U2.84 | length 29.2
  Top Layer w0.203: U2.84@53.214,44.321 53.214,45.84 59.912,52.538 68.028,52.538 72.025,56.536 72.025,59.157 P7.17@73.32,60.452
PD4: P7.20 U2.85 | length 25.5
  Top Layer w0.203: U2.85@52.714,44.321 52.714,45.897 59.873,53.056 67.391,53.056 70.78,56.445 P7.20@70.78,57.912
PD5: P7.19 U2.86 | length 27.9
  Top Layer w0.203: U2.86@52.214,44.321 52.214,45.996 59.816,53.597 66.694,53.597 69.409,56.312 69.409,59.08 P7.19@70.78,60.452
PD6: P7.22 U2.87 | length 24.1
  Top Layer w0.203: U2.87@51.714,44.321 51.714,46.114 59.746,54.146 66.049,54.146 68.24,56.337 P7.22@68.24,57.912
PD7: P7.21 U2.88 | length 26.5
  Top Layer w0.203: U2.88@51.214,44.321 51.214,46.206 59.648,54.639 65.343,54.639 66.911,56.207 66.911,59.122 P7.21@68.24,60.452
PD8: P8.31 U2.55 | length 28.6
  Top Layer w0.203: U2.55@59.214,32.321 61.574,32.321 63.479,30.416 63.479,8.572 P8.31@64.684,7.366
PD9: P8.32 U2.56 | length 26.8
  Top Layer w0.203: U2.56@59.214,32.821 61.963,32.821 64.151,30.632 64.151,10.702 64.684,10.169 P8.32@64.684,9.906
PD10: P8.33 U2.57 | length 31.1
  Top Layer w0.203: U2.57@59.214,33.321 62.25,33.321 64.761,30.81 64.761,12.09 65.954,10.897 65.954,8.89 67.224,7.62 P8.33@67.224,7.366
PD11: P8.34 U2.58 | length 29.3
  Top Layer w0.203: U2.58@59.214,33.821 62.69,33.821 65.495,31.016 65.495,12.801 67.224,11.072 P8.34@67.224,9.906
PD12: P8.35 U2.59 | length 33.8
  Top Layer w0.203: U2.59@59.214,34.321 63.485,34.321 66.216,31.59 66.216,13.585 68.494,11.306 68.494,8.636 P8.35@69.764,7.366
PD13: P8.36 U2.60 | length 32.1
  Top Layer w0.203: U2.60@59.214,34.821 63.976,34.821 66.964,31.833 66.964,14.256 69.673,11.547 69.673,9.997 P8.36@69.764,9.906
PD14: P8.37 U2.61 | length 36.5
  Top Layer w0.203: U2.61@59.214,35.321 64.543,35.321 67.852,32.012 67.852,14.588 71.161,11.278 71.161,8.509 P8.37@72.304,7.366
PD15: P8.38 U2.62 | length 34.9
  Top Layer w0.203: U2.62@59.214,35.821 65.084,35.821 68.671,32.234 68.671,14.911 72.373,11.209 72.373,10.092 72.431,10.033 P8.38@72.304,9.906
PE0: P6.10 U2.97 | length 19.5
  Top Layer w0.203: P6.10@35.601,57.531 35.601,54.407 40.677,49.332 43.577,49.332 46.715,46.194 U2.97@46.715,44.321
PE1: P6.9 U2.98 | length 22.9
  Top Layer w0.203: P6.9@35.601,60.071 34.585,59.055 34.585,54.458 40.199,48.844 43.399,48.844 46.215,46.029 U2.98@46.215,44.321
PE2: P6.12 U2.1 | length 19.9
  Top Layer w0.203: P6.12@33.061,57.531 33.188,57.404 33.188,52.634 42.104,43.718 42.104,42.654 42.437,42.321 U2.1@43.215,42.321
PE3: P6.11 U2.2 | length 23.9
  Top Layer w0.203: P6.11@33.061,60.071 31.847,58.857 31.847,53.259 41.748,43.358 41.748,42.507 42.434,41.821 U2.2@43.215,41.821
PE4: P6.14 U2.3 | length 22
  Top Layer w0.203: P6.14@30.521,57.531 30.521,53.95 41.393,43.078 41.393,42.252 42.323,41.321 U2.3@43.215,41.321
PE5: P6.13 U2.4 | length 26
  Top Layer w0.203: P6.13@30.521,60.071 29.302,58.852 29.302,54.508 41.012,42.799 41.012,42.13 42.32,40.821 U2.4@43.215,40.821
PE6: P6.16 U2.5 | length 24
  Top Layer w0.203: P6.16@27.981,57.531 27.981,55.016 40.656,42.342 40.656,41.982 42.317,40.321 U2.5@43.215,40.321
PE7: P8.16 U2.38 | length 21.5
  Top Layer w0.203: P8.16@44.364,9.906 44.364,11.176 51.503,18.315 51.503,23.966 51.214,24.255 U2.38@51.214,28.321
PE8: P8.17 U2.39 | length 24.1
  Top Layer w0.203: P8.17@46.904,7.366 45.634,8.636 45.634,11.252 51.859,17.477 51.859,24.113 51.714,24.257 U2.39@51.714,28.321
PE9: P8.18 U2.40 | length 20.6
  Top Layer w0.203: P8.18@46.904,9.906 46.904,11.328 52.214,16.638 U2.40@52.214,28.321
PE10: P8.19 U2.41 | length 23.4
  Top Layer w0.203: P8.19@49.444,7.366 48.174,8.636 48.174,10.795 52.714,15.335 U2.41@52.714,28.321
PE11: P8.20 U2.42 | length 20
  Top Layer w0.203: P8.20@49.444,9.906 49.444,10.871 53.214,14.641 U2.42@53.214,28.321
PE12: P8.21 U2.43 | length 22.7
  Top Layer w0.203: P8.21@51.984,7.366 50.714,8.636 50.714,11.227 53.714,14.227 U2.43@53.714,28.321
PE13: P8.22 U2.44 | length 19.3
  Top Layer w0.203: P8.22@51.984,9.906 51.984,11.278 54.214,13.508 U2.44@54.214,28.321
PE14: P8.23 U2.45 | length 22
  Top Layer w0.203: P8.23@54.524,7.366 53.339,8.552 53.339,11.489 54.714,12.865 U2.45@54.714,28.321
PE15: P8.24 U2.46 | length 18.7
  Top Layer w0.203: P8.24@54.524,9.906 54.524,10.035 55.214,10.725 U2.46@55.214,28.321
VBAT: C11.2 D5.1 P11.3 U2.6 | length 40.3
  Top Layer w0.203: C11.2@41.249,40.174 41.602,39.821 U2.6@43.215,39.821
  Top Layer w0.508: v1(32.757,46.507) v1(33.392,46.507) 35.413,46.507 41.203,40.717 41.203,40.22 C11.2@41.249,40.174
  Top Layer w0.762: v1@20.571,40.191 20.562,40.183 v1(20.562,39.522) D5.1@20.562,36.322 20.562,32.844 20.869,32.537 P11.3@20.869,30.226
  Bottom Layer w0.762: v1(20.562,39.522) 20.562,41.135 25.935,46.507 v1(32.757,46.507) v1(33.392,46.507)
  other v1: 20.562,40.234
VBUS_CC: C1.2 C2.2 P5.A4 P5.B4 P10.2 P12.1 P12.3 U1.1 U1.9 U1.10 | length 157.3
  Top Layer w0.254: U1.1@79.078,80.824 79.078,81.561 v1(79.243,81.725)
  Top Layer w0.559: 79.493,77.522 C1.2@82.364,77.522 ; 82.591,82.221 82.776,82.221 ; P5.B4@83.209,84.126 83.209,83.586 83.192,83.569 83.192,82.637 ; 87.671,82.221 88.109,82.221 ; P5.A4@88.109,84.126 88.109,82.221 ; 88.122,82.659 88.56,82.221 88.109,82.221 ; 82.776,82.221 83.192,82.637 ; 82.776,82.221 83.607,82.221 83.192,82.637
  Top Layer w1.27: v1(54.143,62.992) v1(55.159,62.992) v1(56.302,62.992) 86.401,62.992 88.51,65.1 P12.1@88.51,70.943 P12.3@91.05,70.943
  Bottom Layer w0.254: v1(79.243,81.725) 79.748,81.22 v1(79.748,77.572)
  Bottom Layer w1.27: P10.2@6.326,31.197 6.375,31.149 6.375,29.985 7.119,29.242 10.492,29.242 11.66,30.41 11.66,50.687 9.898,52.449 9.898,60.464 12.426,62.992 v1(55.159,62.992) v1(56.302,62.992) ; 84.723,77.876 84.723,71.687 85.467,70.943 P12.1@88.51,70.943 P12.3@91.05,70.943
  other v1: 84.73,76.719 84.73,77.423 84.73,78.127
VBUS_FS: P4.1 R46.2 U6.3
VBUS_HS: P1.1 R45.2 U5.3
VDD: C9.1 C13.1 C18.2 C19.1 D5.2 P6.2 P6.4 P9.7 P9.8 P11.5 U2.11 U2.28 U2.75 | length 194.6
  Top Layer w0.203: C18.2@45.99,26.619 45.99,27.203 46.215,27.428 ; C18.2@46.128,26.799 46.109,26.818 46.109,27.076 46.215,27.181 46.215,27.428 ; U2.28@46.215,28.321 46.215,27.428
  Top Layer w0.254: C13.1@39.542,36.744 39.566,36.768 40.089,36.768 40.264,36.943 ; C13.1@39.546,36.943 40.264,36.943 ; U2.11@43.215,37.321 40.642,37.321 40.264,36.943 ; U2.75@58.715,42.321 U2.75@59.214,42.321 U2.75@59.71,42.321 ; C9.1@60.504,42.499 59.993,42.499 59.984,42.49 59.879,42.49 U2.75@59.71,42.321 ; C9.1@60.747,42.672 60.396,42.321 U2.75@59.71,42.321
  Top Layer w0.508: v1@38.46,36.243 38.774,36.557 v1(38.935,36.557) 39.124,36.746 ; 38.683,36.481 38.948,36.746 39.124,36.746 ; C13.1@39.546,36.792 39.5,36.746 39.124,36.746 ; v1(59.376,43.637) 60.011,43.637 60.57,43.078 C9.1@60.57,42.647
  Top Layer w0.559: v1@44.627,23.146 45.26,23.146 v1(45.279,23.165) 45.954,23.84 C19.1@45.954,25.425 C18.2@45.954,26.609
  Top Layer w0.762: D5.2@18.202,36.322 18.266,36.259 18.266,30.29 P11.5@18.329,30.226 ; P6.4@43.221,57.531 P6.2@45.761,57.531 45.761,54.61 ; v1@45.736,53.67 46.549,53.67 46.625,53.746 45.761,54.61 ; v1@45.736,53.823 v1@45.761,53.848 ; v1@45.761,53.696 v1@45.761,53.786 ; v1@45.78,53.767 v1@45.761,53.786 ; v1@45.761,53.786 v1@45.761,53.848 ; v1@45.761,53.848 45.761,54.61
  Bottom Layer w0.559: P11.5@18.329,30.072 19.599,28.802 19.599,26.162
  Bottom Layer w0.762: P11.5@18.329,30.072 P11.5@18.329,30.226 18.329,34.91 18.776,35.357 23.683,35.357 ; 19.599,26.162 19.599,25.423 21.832,23.19 v1@45.203,23.19 ; v1(38.935,36.557) 37.735,35.357 25.121,35.357 ; P6.2@45.761,57.531 P6.4@43.221,57.531 38.971,53.281 38.971,45.097 38.382,44.508 27.633,44.508 24.273,41.148 24.273,36.205 ; v1(46.625,53.696) 45.812,53.696 v1(45.736,53.619) 44.624,52.507 44.624,44.826 45.812,43.637 v1@59.249,43.637 ; P9.8@90.592,37.287 90.516,37.211 88.052,37.211 62.447,37.211 60.062,39.597 60.062,42.824 ; 23.683,35.357 24.273,35.357 ; 23.683,35.357 24.273,35.946 ; 24.273,35.357 25.121,35.357 ; 24.273,35.357 24.273,35.946 ; 24.273,35.946 24.273,36.205 ; 24.273,36.205 25.121,35.357 ; v1@59.249,43.637 60.062,42.824 ; v1@59.249,43.637 v1(59.376,43.637) v1(60.062,43.637) 60.062,42.824
  other v1: 44.593,23.165 18.289,31.831 38.46,36.216
VDDA: C17.1 R17.1 R18.2 U2.22 | length 11.4
  Top Layer w0.254: C17.1@41.012,29.566 41.012,30.805 42.028,31.821 U2.22@43.215,31.821 U2.22@43.729,31.821
  Top Layer w0.508: R17.1@39.488,27.711 39.957,27.711 40.255,28.009 40.255,29.268 40.552,29.566 C17.1@40.986,29.566
  Top Layer w0.635: R18.2@36.567,25.972 38.587,25.972 39.488,26.873 R17.1@39.488,27.635
VIO: C8.2 C20.1 C21.1 P6.1 P6.3 P11.1 R1.1 R2.1 R18.1 S3.1 U2.50 U2.100 | length 176.3
  Top Layer w0.203: C8.2@44.271,45.606 44.293,45.627 44.832,45.627 45.051,45.408 45.051,45.012 45.111,44.952 U2.100@45.21,44.853 ; C8.2@44.364,45.771 44.872,45.771 45.21,45.433 U2.100@45.21,44.853 ; U2.100@45.215,44.321 U2.100@45.215,44.829 ; U2.100@45.21,44.853 45.215,44.849 U2.100@45.215,44.829 ; U2.100@45.21,44.853 45.21,44.834 U2.100@45.215,44.829
  Top Layer w0.254: U2.50@57.214,28.829 U2.50@57.214,28.321 57.214,27.549 ; C21.1@57.663,25.939 57.663,26.864 57.214,27.313 57.214,27.549 ; C21.1@57.825,26.213 57.825,26.938 57.214,27.549
  Top Layer w0.508: v2@34.364,25.456 v2@34.93,25.456 ; v2@34.375,25.455 34.475,25.455 34.926,25.906 ; v2@34.905,25.456 v2@34.909,25.461 ; v2@34.926,25.472 34.926,25.906 ; R18.1@36.567,26.822 35.386,26.822 34.926,26.362 34.926,25.906 ; v1(41.951,46.507) v1@41.956,46.503 ; v1@41.956,46.507 v1@41.956,46.503 ; v1@42.033,45.905 41.971,45.967 v1@41.971,46.488 ; v1@42.182,45.771 42.688,45.771 ; C8.2@44.364,45.771 42.688,45.771 ; C21.1@57.663,25.939 57.663,25.274 ; v2(58.292,24.645) v2@58.284,24.653 ; v2(58.939,24.659) 58.933,24.653 v2@58.284,24.653 ; v1@74.432,25.304 v1(74.413,25.324) ; R2.1@75.987,25.756 75.987,25.731 R2.1@75.979,25.723 ; R1.1@75.987,27.915 75.979,27.907 R2.1@75.979,25.723 ; S3.1@92.242,12.675 90.718,14.199 85.385,14.199 83.988,15.596 79.797,15.596 79.112,16.281 79.112,21.379 75.979,24.511 ; v1@41.956,46.503 v1@41.971,46.488 ; v1@41.971,46.488 42.688,45.771 ; 57.663,25.274 v2@58.284,24.653 ; 57.663,25.274 C20.1@57.663,24.653 v2@58.284,24.653 ; v1(74.413,25.324) 75.175,25.324 ; v1(74.413,25.324) v1(74.413,24.562) 74.794,24.943 ; 74.794,24.943 75.175,25.324 ; 74.794,24.943 75.548,24.943 75.979,24.511 ; 75.175,25.324 75.556,25.324 75.916,25.685 75.941,25.685 R2.1@75.979,25.723 ; 75.979,24.511 R2.1@75.979,25.723
  Top Layer w0.762: P6.3@43.221,60.071 P6.1@45.761,60.071
  Bottom Layer w0.508: 57.878,25.324 58.292,24.91 ; 58.939,25.324 v2@58.939,24.767 ; 59.495,25.324 v2@58.939,24.767 ; 58.292,24.91 58.292,25.199 58.417,25.324 58.608,25.133 58.608,24.645 ; 58.292,24.91 v2(58.292,24.645) 58.608,24.645 ; 58.608,24.645 58.924,24.645 v2(58.939,24.659) v2@58.939,24.767
  Bottom Layer w0.762: P11.1@23.409,30.226 25.351,28.284 28.312,25.324 57.878,25.324 58.417,25.324 58.939,25.324 59.495,25.324 60.928,25.324 ; P6.3@43.221,60.071 47.424,60.071 48.469,59.026 48.469,56.349 47.632,55.512 44.53,55.512 41.951,52.934 v1(41.951,46.507) v1(41.951,45.72) 41.951,34.519 43.653,32.817 58.319,32.817 61.562,29.574 61.562,25.958 ; 60.928,25.324 61.357,25.324 ; 60.928,25.324 61.562,25.958 ; 61.357,25.324 62.196,25.324 ; 61.357,25.324 61.562,25.529 61.562,25.958 ; 61.562,25.958 62.196,25.324 ; 62.196,25.324 73.651,25.324 ; 73.651,25.324 v1(74.413,24.562) v1(74.413,25.324) 73.651,25.324
  other v2: 34.338,25.456 34.964,25.456
VREF+: R17.2 U2.21 | length 6
  Top Layer w0.203: R17.2@39.488,28.561 39.488,29.82 41.989,32.321 U2.21@43.215,32.321
VREF-: R16.2 U2.20 | length 7
  Top Layer w0.203: R16.2@38.268,28.561 38.268,29.104 41.986,32.821 U2.20@43.215,32.821
X32KI: C10.2 R14.2 U2.8 Y1.1 | length 11.8
  Top Layer w0.203: R14.2@32.29,40.665 Y1.1@34.433,40.665 Y1.1@34.58,40.665 ; Y1.1@34.58,40.519 Y1.1@34.58,40.665 ; U2.8@43.215,38.821 39.554,38.821 37.71,40.665 Y1.1@34.58,40.665
X32KO: C12.2 R15.2 U2.9 Y1.2 | length 11.5
  Top Layer w0.203: R15.2@32.187,38.165 Y1.2@34.433,38.165 35.892,38.165 36.346,37.711 37.202,37.711 37.659,37.711 38.272,38.325 40.475,38.325 40.479,38.321 U2.9@43.215,38.321
XI: C15.2 U2.12 Y2.1 | length 11.9
  Top Layer w0.203: Y2.1@32.812,34.431 32.812,35.327 32.932,35.446 36.973,35.446 39.323,35.446 40.698,36.821 U2.12@43.215,36.821
XO: C16.2 U2.13 Y2.3 | length 10.5
  Top Layer w0.203: Y2.3@34.712,32.131 35.158,32.576 C16.2@36.973,32.576 ; C16.2@36.973,32.526 37.047,32.6 37.44,32.6 38.167,33.326 38.167,33.704 40.784,36.321 U2.13@43.215,36.321
pads on no net: P5.A6 P5.A7 P5.A8 P5.B6 P5.B7 P5.B8 U1.2 U1.3 U2.0 U4.

## Polygon pours and split planes (outlines as drawn)
GND on Top Layer "GND" (solid, remove dead copper, pour order 0): 0,0 0,92 98,92 98,0
GND on Bottom Layer "GND" (solid, remove dead copper, pour order 1): 0,0 0,92 98,92 98,0

## Keep-outs
Keep-Out Layer:
  the board outline again, w0.254

## Other copper
Top Layer:
  rectangle net GND: 74.804,80.049 75.784,81.671
  rectangle net GND: 76.298,80.021 77.166,81.046
  rectangle net GND: 74.189,78.384 83.282,80.177
  region net 5V: 47.044,72.493 47.251,72.493 47.77,73.012 47.77,73.926 47.836,73.992 48.638,73.992 48.814,73.816 48.814,72.843 49.126,72.532 49.126,71.799 48.782,71.455 47.057,71.455 46.823,71.689 46.823,72.389
  region net 5V: 66.881,73.244 66.942,73.305 68.432,73.305 68.816,73.689 69.261,73.689 69.606,73.344 69.606,71.529 69.629,71.507 69.517,71.396 67.325,71.396 67.215,71.286 66.392,71.286 66.217,71.461 66.171,71.461 66.171,71.988 66.881,72.698
  region net VBUS_FS: 64.119,79.029 64.3,79.21 65.585,79.21 65.734,79.082 65.734,75.226 65.994,74.966 67.627,74.966 67.843,74.75 67.843,73.738 67.703,73.598 66.438,73.598 65.818,72.978 64.144,72.978 63.951,73.171 63.951,74.436 64.119,74.605
  region net VBUS_HS: 40.176,78.793 40.176,76.427 40.679,75.923 43.787,75.923 44.5,75.21 44.5,73.697 44.607,73.59 45.673,73.59 46.344,74.261 48.558,74.261 48.69,74.393 48.69,75.5 48.434,75.757 46.244,75.757 44.571,77.43 41.833,77.43 41.63,77.633 41.63,79.045 41.52,79.155 40.361,79.155
  pour cut-out: 76.851,81.298 75.88,81.298 75.623,81.555 75.623,82.76 75.705,82.843 76.869,82.843 76.934,82.778 76.934,81.36
  pour cut-out: 74.373,75.391 74.373,70.219 74.321,70.167 74.303,70.184 72.331,70.184 72.331,68.991 72.227,68.887 72.297,68.818 79.32,68.818 79.32,70.132 79.355,70.167 79.32,70.201 77.261,70.201 77.227,70.236 77.227,74.543 76.76,75.01 76.76,75.443
  region net 5V: 71.205,74.78 71.441,74.549 71.441,70.573 73.702,70.502 73.702,81.217 73.513,81.406 71.653,81.406 71.205,80.958
  region net NetC3_2: 77.523,78.105 78.17,78.105 78.2,78.075 78.2,75.646 79.976,73.869 79.976,71.21 79.587,70.821 77.728,70.821 77.456,71.093 77.456,74.645 77.144,74.957 77.144,76.819 77.457,77.131 77.457,78.086
  region net VBUS_CC: 82.263,81.191 82.471,80.983 83.778,80.983 83.993,80.768 83.993,78.279 83.788,78.099 78.51,78.099 78.446,78.035 78.446,75.832 78.693,75.585 85.995,75.585 86.59,76.181 86.59,80.297 86.788,80.494 88.912,80.494 89.111,80.659 89.111,82.266 88.408,82.969 88.408,84.791 88.294,84.906 87.926,84.906 87.82,84.799 87.82,82.872 87.624,82.676 83.81,82.676 83.483,83.003 83.483,84.922 82.951,84.896 82.951,83.106 82.263,82.419